# Altium PCB DBD_plasma.PcbDoc
Units mm, origin at the board's own origin, x right, y up, seen from the top; angles counter-clockwise.
Board outline 180 x 60 mm, 4 copper layers (Top Layer, GND, PWR_SIG, Bottom Layer), stack 1.63 mm thick; 123 components, 73 nets, 396 pads, 0 vias.
Unrouted connection lines stored in the file: 242.
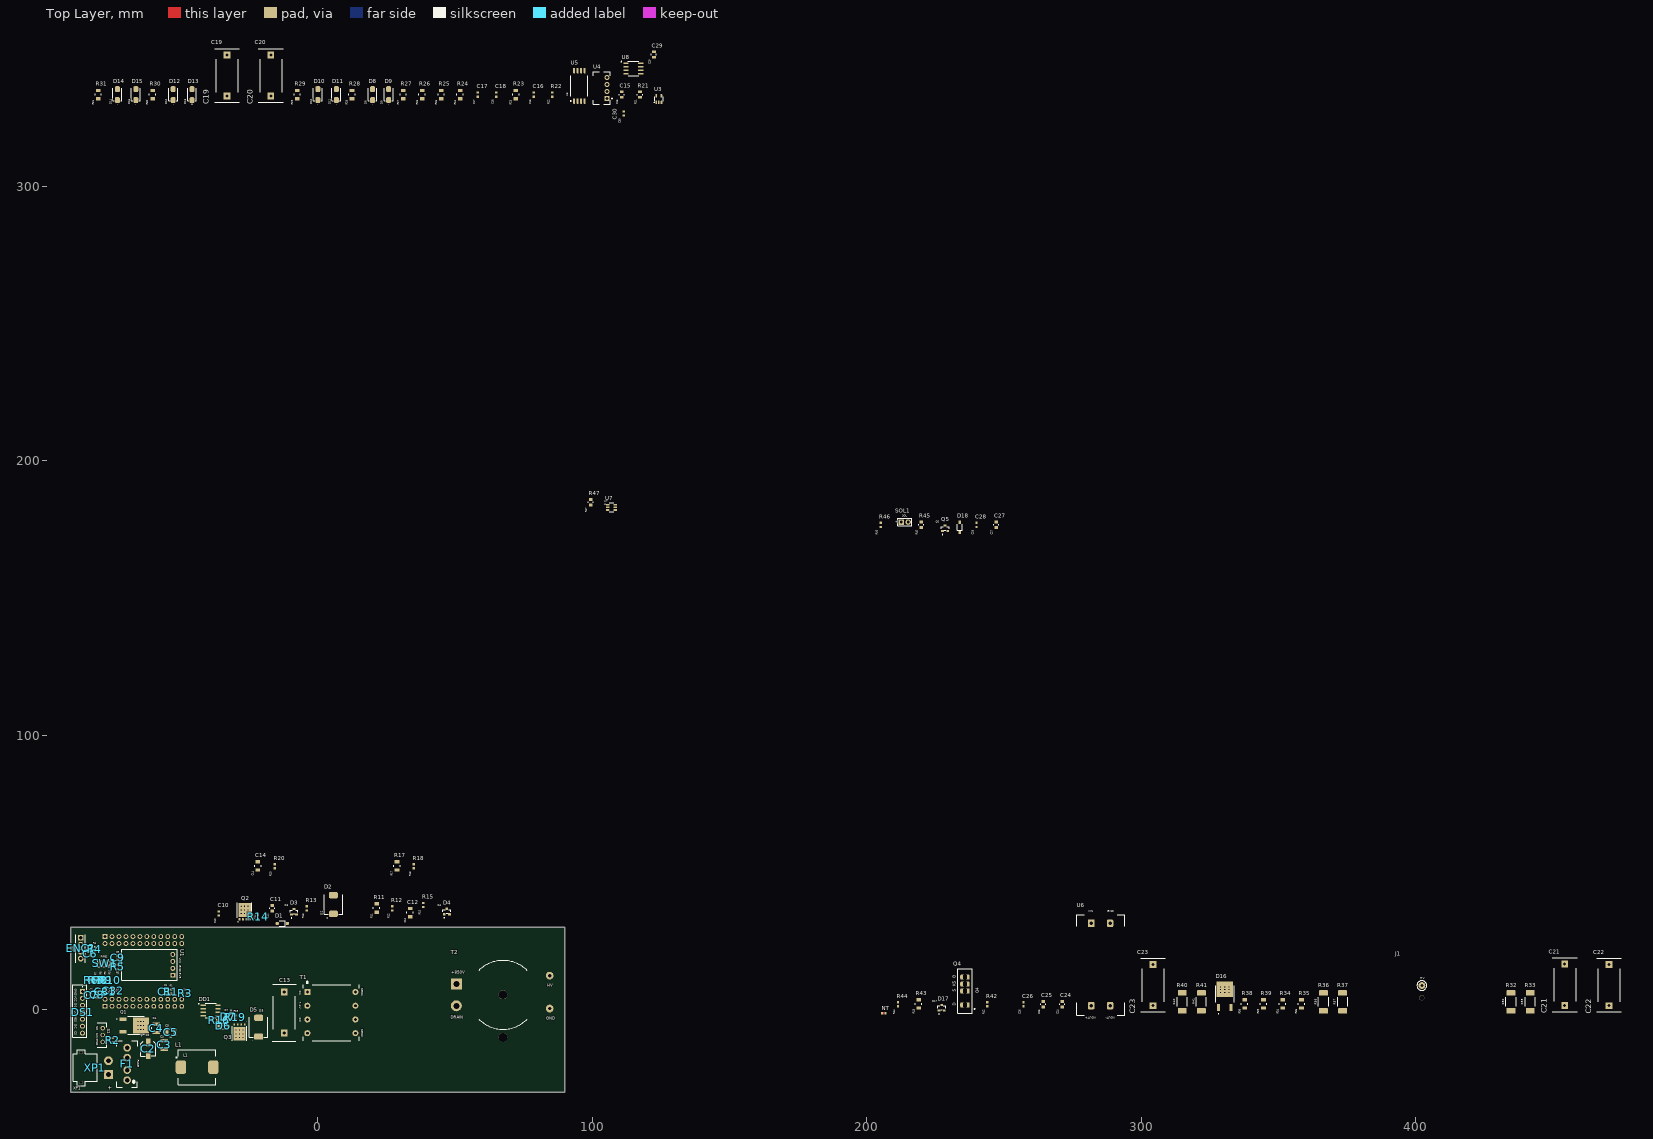
[diagram p0: Top Layer view]
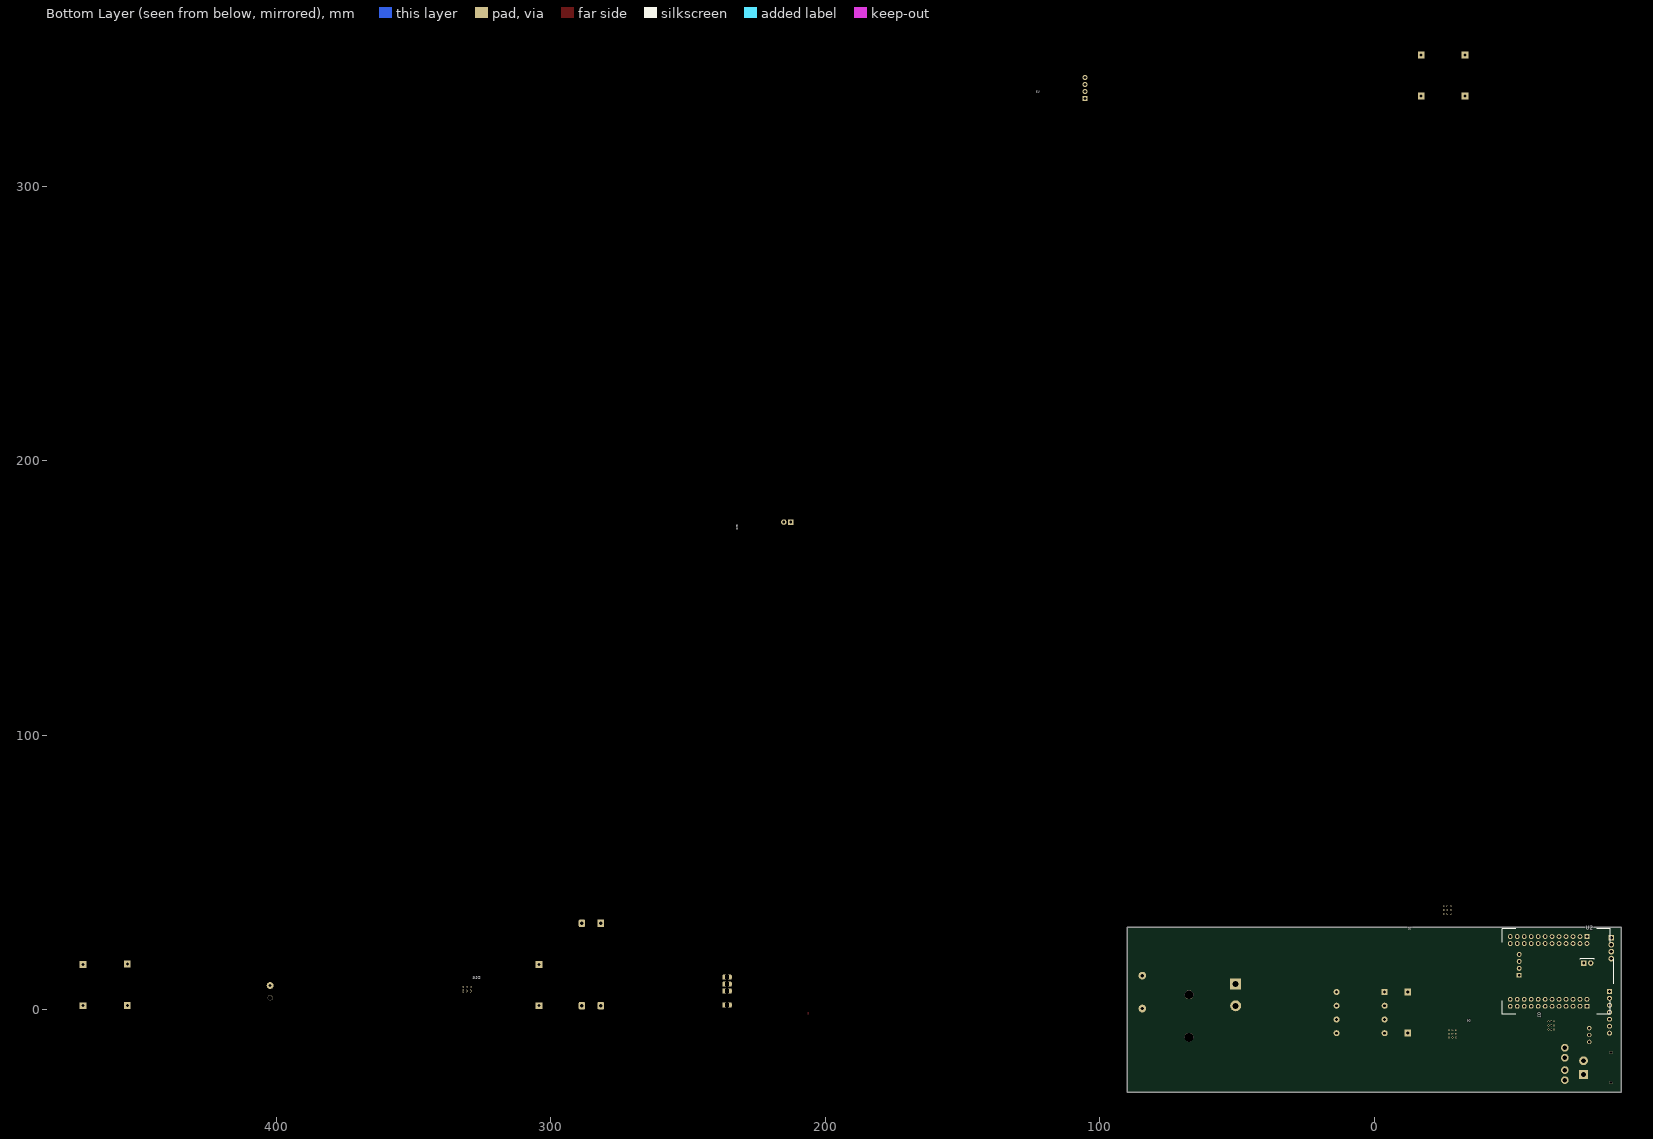
[diagram p1: Bottom Layer view, seen from below]

## Layer stack, top to bottom
Top Solder: solder mask 0.0102, Solder Resist, Dk 3.5
Top Layer: signal copper 0.0356
Dielectric 1: prepreg 0.2108, PP-006, Dk 4.1
GND: signal copper 0.035
Dielectric 2: dielectric 1.0668, FR-4, Dk 4.8
PWR_SIG: signal copper 0.035
Dielectric 3: prepreg 0.2108, PP-006, Dk 4.1
Bottom Layer: signal copper 0.0356
Bottom Solder: solder mask 0.0102, Solder Resist, Dk 3.5

## Board outline
-90,-30 90,-30 90,30 -90,30

## Design rules (kind name [scope] priority, off if disabled: settings)
Clearance Clearance_HV_Pulse_7kV [InNetClass('HV_PULSE')] p1: gap=8 ignorepadtopadclearanceinfootprint=TRUE
Clearance Clearance_HV_Divider [InComponent('R23') Or InComponent('R24') Or InComponent('R25') Or InComponent('R26') vs InComponent('R23') Or InComponent('R24') Or InComponent('R25') Or InComponent('R26')] p2: gap=0.8 ignorepadtopadclearanceinfootprint=FALSE
Clearance Clearance_SiC_Gate_Loop [InNetClass('SIC_GATE') vs InNetClass('PWR_BAT') or InNetClass('ZVS_RESONANT')] p3: gap=1.5 ignorepadtopadclearanceinfootprint=FALSE
Clearance Clearance_HV_DC_Internal [InNetClass('HV_DC_850V') vs InNetClass('HV_DC_850V')] p4: gap=2.5 ignorepadtopadclearanceinfootprint=FALSE
Clearance Clearance_HV_to_LV_Barrier [InNetClass('HV_DC_850V') vs NOT InNetClass('HV_DC_850V')] p5: gap=6 ignorepadtopadclearanceinfootprint=TRUE
Clearance [All] p6: gap=0.15 ignorepadtopadclearanceinfootprint=FALSE
MinimumSolderMaskSliver [All] p1: minsoldermaskwidth=0.1
PolygonConnect PolygonConnect_Thermal [IsThruPin] p1: connectstyle=Relief reliefconductorwidth=0.5 reliefentries=4 polygonreliefangle="90 Angle" airgapwidth=0.3
PolygonConnect PolygonConnect_Direct [InNetClass('PWR_BAT') or InNetClass('ZVS_RESONANT') or InNetClass('HV_DC_850V')] p2: connectstyle=Direct reliefconductorwidth=0.254 reliefentries=4 polygonreliefangle="90 Angle" airgapwidth=0.254
PolygonConnect [All] p3: connectstyle=Relief reliefconductorwidth=0.254 reliefentries=4 polygonreliefangle="90 Angle" airgapwidth=0.254
RoutingVias RoutingVias_Power [InNetClass('PWR_BAT') or InNet('GND') or InNet('HV_GND')] p1: holewidth=0.4 width=0.8 viastyle="Through Hole" minholewidth=0.3 minwidth=0.6 maxholewidth=0.5 maxwidth=1
RoutingVias [All] p2: holewidth=0.3 width=0.5 viastyle="Through Hole" minholewidth=0.3 minwidth=0.5 maxholewidth=0.5 maxwidth=0.8
ShortCircuit [InComponent('NT*')] p1: allowed=TRUE
SilkToSolderMaskClearance [IsPad] p1: minsilkscreentomaskgap=0.15 clearancetoexposedcopper=TRUE
SolderMaskExpansion [All] p1: expansion=0.05 istentingtop=FALSE
SupplyNets "Schematic Supply Nets_4" [InNet('+3V3')] p1: voltage=0.000
SupplyNets "Schematic Supply Nets_3" [InNet('VBAT_SW')] p2: voltage=0.000
SupplyNets "Schematic Supply Nets_2" [InNet('HV_GND')] p3: voltage=0.000
SupplyNets "Schematic Supply Nets_1" [InNet('GND')] p4: voltage=0.000
SupplyNets "Schematic Supply Nets" [InNet('HV_BUS')] p5: voltage=0.000
Width Width_3V3_Logic_PWR [InNet('+3V3') or InNet('+15V_SIC')] p1: maxlimit=1 minlimit=0.3 preferedwidth=0.5
Width Width_SiC_Gate [InNetClass('SIC_GATE')] p2: maxlimit=1 minlimit=0.4 preferedwidth=0.6
Width Width_ZVS_Resonant [InNetClass('ZVS_RESONANT')] p3: maxlimit=15 minlimit=3 preferedwidth=4.5
Width Width_PWR_Battery [InNetClass('PWR_BAT')] p4: maxlimit=5 minlimit=2 preferedwidth=3
Width [All] p5: maxlimit=1 minlimit=0.15 preferedwidth=0.2
27 further rules are at their usual default settings.

## Classes and differential pairs
component class 06_Pneumatics: C27 C28 D18 Q5 R45 R46 SOL1
component class 05_SiC_Nanosecond_Stage: C21 C22 C23 C24 C25 C26 D16 D17 J1 NT Q4 R32 R33 R34 R35 R36 R37 R38 R39 R40 R41 R42 R43 R44 R47 T2 U6 U7
component class 04_HV_Bus_Sense: C15 C16 C17 C18 C19 C20 C29 C30 D8 D9 D10 D11 D12 D13 D14 D15 R21 R22 R23 R24 R25 R26 R27 R28 R29 R30 R31 U3 U4 U5 U8
component class 03_ZVS_PushPull: C10 C11 C12 C13 C14 D1 D2 D3 D4 D5 D6 D7 DD1 L1 Q2 Q3 R11 R12 R13 R14 R15 R16 R17 R18 R19 R20 T1
component class 02_MCU_Control_UI: C6 C7 C8 C9 C31 C32 DS1 ENC? R4 R5 R6 R7 R8 R9 R10 SW1 U2
component class 01_Power_Input: C1 C2 C3 C4 C5 F1 Q1 R1 R2 R3 S1 U1 XP1

## Components (designator, comment, footprint, x,y, rotation, side; value= is the part's Value field where it differs from the comment)
C1 "100nF" CHIP_0603_SMD -55.5,6.625 r90 top
C2 "100uF 16V" CAP_ALU_SMD_D5.0_L5.4 -61.725,-14.125 r270 top
C3 "22uF 25V" CHIP_1210_3225 -55.875,-12.825 r90 top
C4 "22uF 25V" CHIP_1210_3225 -58.875,-6.75 r270 top
C5 "22uF 25V" CHIP_1210_3225 -53.55,-8.225 r180 top
C6 "100nF" CHIP_0603_SMD -82.9,20.45 r90 top
C7 "100nF" CHIP_0603_SMD -82.575,5.225 r90 top
C8 "10uF" CHIP_0805_SMD -80.325,5.45 r90 top
C9 "100nF" CHIP_0603_SMD -72.85,18.95 r270 top
C10 "100nF" CHIP_0603_SMD -36.075,35.075 r90 top
C11 "2.2uF 25V" CHIP_0805_SMD -16.523,36.946 r90 top
C12 "2.2nF 100V" CHIP_1206_SMD 33.65,35.375 r90 top
C13 "220nF 100V" CAP_FILM_P15.0_CBB22_W8.5_MKP -12.2,-1 r90 top
C14 "2.2nF 100V" CHIP_1206_SMD -21.794,52.398 r90 top
C15 "4.7uF 16V" CHIP_0805_SMD 110.787,333.347 r90 top
C16 "1nF 50V NP0" CHIP_0603_SMD 78.656,333.347 r90 top
C17 "100nF" CHIP_0603_SMD 58.336,333.347 r90 top
C18 "100nF" CHIP_0603_SMD 65.067,333.347 r90 top
C19 "1nF 2000V" CAP_FILM_P15.0_CBB81_HEAVY_DUTY -33.104,340.332 r90 top
C20 "1nF 2000V" CAP_FILM_P15.0_CBB81_HEAVY_DUTY -17.102,340.332 r90 top
C21 "470pF 2kV" CAP_FILM_P15.0_CBB81_HEAVY_DUTY 454.195,9.116 r90 top
C22 "330pF 2kV" CAP_FILM_P15.0_CBB81_HEAVY_DUTY 470.324,8.989 r90 top
C23 "3.3nF 2000V" CAP_FILM_P15.0_CBB81_HEAVY_DUTY 304.208,8.989 r90 top
C24 "2.2uF 25V" CHIP_0805_SMD 271.188,2.004 r90 top
C25 "10uF" CHIP_0805_SMD 264.33,2.004 r90 top
C26 "100nF" CHIP_0603_SMD 257.091,2.004 r90 top
C27 "10uF" CHIP_0805_SMD 247.185,176.629 r90 top
C28 "100nF" CHIP_0603_SMD 239.946,176.629 r90 top
C29 "2.2uF 25V" CHIP_0805_SMD 122.471,347.952 r90 top
C30 "100nF" CHIP_0603_SMD 111.422,326.489 r90 top
C31 "100nF" CHIP_0603_SMD -77.425,6.625 r270 top
C32 "10uF" CHIP_0805_SMD -74.45,6.85 r270 top
D1 "1N5819HW" SOD-123_2P_SMD -12.9,31.45 r180 top
D2 "39V 1.5kW" DIODE_DO-214AB_SMC 5.702,38.343 r90 top
D3 "BZX84-C15" SOT-23_3P_SMD -8.649,35.676 r0 top
D4 "BAT54C" SOT-23_3P_SMD 47.025,35.775 r0 top
D5 "39V 1.5kW" DIODE_DO-214AB_SMC -21.525,-6.35 r90 top
D6 "1N5819HW" SOD-123_2P_SMD -34.475,-5.9 r0 top
D7 "BZX84-C15" SOT-23_3P_SMD -32.55,-2.55 r180 top
D8 "US2M" DIODE_DO-214AC_SMA 19.982,333.347 r90 top
D9 "US2M" DIODE_DO-214AC_SMA 25.824,333.347 r90 top
D10 "US2M" DIODE_DO-214AC_SMA 0.043,333.347 r90 top
D11 "US2M" DIODE_DO-214AC_SMA 6.774,333.347 r90 top
D12 "US2M" DIODE_DO-214AC_SMA -52.662,333.347 r90 top
D13 "US2M" DIODE_DO-214AC_SMA -45.804,333.347 r90 top
D14 "US2M" DIODE_DO-214AC_SMA -72.982,333.347 r90 top
D15 "US2M" DIODE_DO-214AC_SMA -66.251,333.347 r90 top
D16 "C4D02120E" TO-252-2L_DPAK_THERMAL 330.37,4.925 r0 top
D17 "BAT54S" SOT-23_3P_SMD 227.246,0.734 r0 top
D18 "1N5819HW" SOD-123_2P_SMD 233.85,175.74 r90 top
DD1 "UCC27524DR" SOIC-8_1.27_4.9x3.9mm -39,-0.3 r0 top
DS1 "OLED_0.96_SPI_7PIN" DISP_OLED_0.96_SSD1306_SPI_7PIN_THT -85.675,-0.905 r270 top
ENC? "EC11" ENC_EC11_VERTICAL_THT -86.35,21.175 r270 top
F1 "20A 32V" FUSE_HOLDER_MINI_KEYSTONE_3544 -69.425,-19.725 r90 top
J1 "HV_V/G" PAD_HV_UL3239_28AWG_ROUND 402.175,8.825 r0 top
L1 "22uH 12A" IND_SRP1265A_13.5x12.5_HANDSOLDER -43.95,-20.9 r0 top
NT "net_tie" NET_TIE_SMD 206.164,-1.298 r0 top net-tie
Q1 "AOD4185" TO-252-2L_DPAK_THERMAL -66.875,-5.7 r270 top
Q2 "CSD18534Q5A" SON-8_5x6_CSD18534Q5A_THERMAL -26.625,35.7 r270 top
Q3 "CSD18534Q5A" SON-8_5x6_CSD18534Q5A_THERMAL -28.475,-8.1 r90 top
Q4 "C3M0075120K" TO-247-4_WOLFSPEED_SLOTTED_VERT 235.755,6.83 r90 top
Q5 "AO3400A" SOT-23_3P_SMD 228.516,175.359 r0 top
R1 "47.5k" CHIP_0603_SMD -53.4,6.625 r90 top
R2 "100k" CHIP_0603_SMD -74.65,-11.05 r270 top
R3 "100k" CHIP_0603_SMD -48.3,6 r180 top
R4 "10k" CHIP_0603_SMD -81.15,22.075 r90 top
R5 "10k" CHIP_0603_SMD -72.875,15.625 r270 top
R6 "33R" CHIP_0603_SMD -82.5,10.675 r90 top
R7 "33R" CHIP_0603_SMD -80.775,10.725 r90 top
R8 "33R" CHIP_0603_SMD -79.025,10.8 r90 top
R9 "33R" CHIP_0603_SMD -77.325,10.825 r90 top
R10 "33R" CHIP_0603_SMD -75.65,10.825 r90 top
R11 "5.62" CHIP_1206_SMD 21.45,37.073 r90 top
R12 "10k" CHIP_0603_SMD 27.165,36.946 r90 top
R13 "10k" CHIP_0603_SMD -3.95,36.946 r90 top
R14 "4.7" CHIP_0603_SMD -21.75,33.85 r90 top
R15 "1k" CHIP_0603_SMD 38.425,38.15 r90 top
R16 "4.7" CHIP_0603_SMD -35.85,-3.85 r0 top
R17 "5.62" CHIP_1206_SMD 28.879,52.398 r90 top
R18 "10k" CHIP_0603_SMD 34.975,52.271 r90 top
R19 "10k" CHIP_0603_SMD -30.025,-2.8 r270 top
R20 "1k" CHIP_0603_SMD -15.698,52.271 r90 top
R21 "300" CHIP_0805_SMD 117.391,333.347 r90 top
R22 "3.9k" CHIP_0603_SMD 85.387,333.347 r90 top
R23 "510k" CHIP_1206_SMD 72.179,333.347 r90 top
R24 "510k" CHIP_1206_SMD 51.859,333.347 r90 top
R25 "510k" CHIP_1206_SMD 45.001,333.347 r90 top
R26 "510k" CHIP_1206_SMD 38.016,333.347 r90 top
R27 "3.9M" CHIP_1206_SMD 31.158,333.347 r90 top
R28 "3.9M" CHIP_1206_SMD 12.489,333.347 r90 top
R29 "3.9M" CHIP_1206_SMD -7.45,333.347 r90 top
R30 "3.9M" CHIP_1206_SMD -60.155,333.347 r90 top
R31 "3.9M" CHIP_1206_SMD -79.967,333.347 r90 top
R32 "12R" RES_2512_6.3x3.2_HANDSOLDER 434.637,2.893 r90 top
R33 "12R" RES_2512_6.3x3.2_HANDSOLDER 441.622,2.893 r90 top
R34 "4.7k" CHIP_1206_SMD 351.452,2.131 r90 top
R35 "4.7k" CHIP_1206_SMD 358.31,2.131 r90 top
R36 "12R" RES_2512_6.3x3.2_HANDSOLDER 366.311,2.893 r90 top
R37 "12R" RES_2512_6.3x3.2_HANDSOLDER 373.296,2.893 r90 top
R38 "4.7k" CHIP_1206_SMD 337.609,2.131 r90 top
R39 "4.7k" CHIP_1206_SMD 344.467,2.131 r90 top
R40 "12R" RES_2512_6.3x3.2_HANDSOLDER 314.876,2.893 r90 top
R41 "12R" RES_2512_6.3x3.2_HANDSOLDER 321.861,2.893 r90 top
R42 "4.7" CHIP_0603_SMD 243.883,2.004 r90 top
R43 "0R" CHIP_1206_SMD 218.864,2.131 r90 top
R44 "10k" CHIP_0603_SMD 211.371,2.004 r90 top
R45 "110R" CHIP_0805_SMD 219.88,176.629 r90 top
R46 "10k" CHIP_0603_SMD 205.021,176.629 r90 top
R47 "110R" CHIP_0805_SMD 99.484,184.884 r90 top
S1 "SW_PWR" TNT_SW_SLIDE_2.5mm -78.325,-9.2 r270 top
SOL1 "0520D (6V)" PAD_2P_THT_P2.54MM 213.784,177.645 r0 top
SW1 "KEY_FIRE" PAD_WIRE_2P_STRAIN_P2.54 -77.575,17.025 r180 top
T1 "EFD20" TRANS_EFD20_CORETECH_BH-EFD20-1-8R_THT 4.975,-1.025 r0 top
T2 "T2 (Epcos N87)" TRANS_AUTOTRANS_T2_EPCOS_R20_N87 67.475,5.45 r0 top
U1 "MP2315 (3.3V)" MODULE_DC-DC_MP2315_MINI_BUCK_THT -52.8,16.38 r180 top
U2 "WeAct_STM32G474CEU6" MODULE_WEACT_STM32G474CEU6_DIP -66.31,13.96 r0 bottom
U3 "ME6211C50M5G" SOT-23-5_M5_HANDSOLDER 124.249,331.696 r0 top
U4 "B0505S-1WR3" CONV_DC-DC_MORNSUN_SIP-4_11.6x6.0 103.421,335.76 r90 top
U5 "AMC1311" SOIC-8-DWV_WIDE_HANDSOLDER 95.293,336.522 r90 top
U6 "Step-Up 15V" MODULE_DC-DC_MT3608_BOOST_THT 285.179,16.496 r90 top
U7 "UCC27511" SOT-23-6_DBV_HANDSOLDER 106.977,182.979 r0 top
U8 "LM78L05" SOIC-8_1.27_4.9x3.9mm 114.971,342.814 r0 top
XP1 "7.4V_IN" CONN_XT30PW-M_2P -86.225,-21.05 r90 top

## Footprints (in the part's own frame and the unit in brackets; to place one, negate y for a bottom-side part, rotate by r counter-clockwise, add the part's x,y. Pads: shape width x height; smd on the part's side, far side on the other; paste and mask are expansions set on the pad)
CAP_ALU_SMD_D5.0_L5.4 [mm] "SMD Aluminum Electrolytic Capacitor, Dia 5.0mm, Length 5.4mm, Base 5.3x5.3mm, 100uF 16V, Pitch 4.4mm (Hand Solder)"
  rect 3x1.6 smd mask+0.05: 1(-2.2,0) 2(2.3,-0.025)
  silkscreen extent -2.7,-2.7 2.73,2.7, body extent -3,-2.65 3,2.65, height 5.8
CAP_FILM_P15.0_CBB22_W8.5_MKP [mm] "Film Capacitor Metallized  (MKP/CBB22), Pitch 15mm, Body 18.0x8.5x14.0mm, ZVS Resonant Tank"
  rect 2.5x2.5 hole 1.1 mask+0.05: 1(-7.5,0) 2(7.5,0)
  silkscreen extent -10.4,-4.32 10.28,4.35, body extent -9.33,-3.9 9.17,4.1, height 18
CAP_FILM_P15.0_CBB81_HEAVY_DUTY [mm] "Radial Film Capacitor (Dipped Epoxy/Pillow Type). Pitch: 15.0mm. Optimized for CBB81"
  rect 2.5x2.5 hole 1.1 mask+0.05: 1(-7.5,0) 2(7.5,0)
  silkscreen extent -9.75,-4.5 9.75,4.5, body extent -9.25,-4.53 9.25,4.48, height 19
CHIP_0603_SMD [mm] "Chip Component 0603 (1608 Metric), Hand Soldering Extended Pads (0.8x0.85mm, Pitch 1.5mm), IPC-7351"
  rect 0.8x0.85 smd mask+0.05: 1(-0.75,0) 2(0.75,0)
  body extent -0.83,-0.48 0.77,0.47, height 0.8
CHIP_0805_SMD [mm] "Chip Component 0805 (2012 Metric), IPC-7351 Level B (Nominal), Pad 1.0x1.3mm, Pitch 2.0mm"
  rect 1x1.3 smd mask+0.05: 1(-1,0) 2(1,0)
  silkscreen extent -0.2,-0.9 0.2,0.95, body extent -1,-0.63 1,0.63, height 1.22
CHIP_1206_SMD [mm] "Chip Component 1206 (3216 Metric), IPC-7351 Level B (Nominal), Pad 1.2x1.7mm, Pitch 3.0mm"
  rect 1.2x1.7 smd mask+0.05: 1(-1.5,0) 2(1.5,0)
  silkscreen extent -0.3,-1.15 0.3,1.15, body extent -1.6,-0.8 1.6,0.8, height 0.8
CHIP_1210_3225 [mm] "Chip Component 1210 (3225 Metric), IPC-7351 Level B (Nominal), Pad 1.2x2.7mm, Pitch 3.0mm"
  rect 1.2x2.7 smd mask+0.05: 1(-1.5,0) 2(1.5,0)
  silkscreen extent -0.4,-1.65 0.4,1.65, body extent -1.6,-1.25 1.6,1.25, height 1.22
CONN_XT30PW-M_2P [mm] "DC Power Connector, Male 90° (Right Angle) PCB Mount, 2-Pin, Pitch 5.0mm, 30A Cont. / 50A Peak, with Locating Pins, Amass XT30PW-M"
  rect 3.2x3.2 hole 1.75 mask+0.05: 1(-2.5,-10)
  round 3.2 hole 1.75 mask+0.05: 2(2.5,-10)
  round 1.1 hole 1.1 unplated mask+0.05: ""(-5.5,0) ""(5.5,0)
  silkscreen extent -6.58,-6 6.58,2.88, body extent -6.65,-11 6.65,2.95, height 5
CONV_DC-DC_MORNSUN_SIP-4_11.6x6.0 [mm] "Isolated DC-DC Converter 1W, SIP-4 Package, Mornsun B_S-1WR3 / E_S-1WR3 Series, Body 11.60x6.00x10.16mm, Pitch 2.54mm, 3kV Isolation"
  rect 1.8x1.8 hole 1 mask+0.05: 1(-3.81,-1.95)
  round 1.8 hole 1 mask+0.05: 2(-1.27,-1.95) 3(1.27,-1.95) 4(3.81,-1.95)
  silkscreen extent -5.9,-3.8 5.9,3.1, body extent -5.8,-3 5.8,2.99, height 10.66
DIODE_DO-214AB_SMC [mm] "DO-214AB (SMC) Surface Mount Diode, 2-Lead, Body 7.0x6.0mm, Total Span 8.0mm, IPC-7351 Nominal"
  rrect50% 2.3x3.3 smd mask+0.05: 1(-3.4,0) 2(3.4,0)
  silkscreen extent -4.92,-3.35 3.6,3.35, body extent -3.95,-3.1 3.95,2.7, height 2.23
DIODE_DO-214AC_SMA [mm] "DO-214AC (SMA) Surface Mount Diode, 2-Lead, Body 4.6x2.8mm, Total Span 5.6mm, IPC-7351 Nominal"
  rrect50% 2.1x1.8 smd mask+0.05: 1(-2,0) 2(2,0)
  silkscreen extent -3.52,-1.6 2.3,1.6, body extent -2.5,-1.35 2.55,1.35, height 2.17
DISP_OLED_0.96_SSD1306_SPI_7PIN_THT [mm] "0.96 inch OLED Display Module, SSD1306, 128x64, 7-Pin 2.54mm SPI Header, 4x M2 Mounting Holes (23.3x23.8mm Pitch), Body 27.30x27.80mm"
  rect 1.8x1.8 hole 1.05 mask+0.05: 1(-7.62,0)
  round 1.8 hole 1.05 mask+0.05: 2(-5.08,0) 3(-2.54,0) 4(0,0) 5(2.54,0) 6(5.08,0) 7(7.62,0)
  silkscreen extent -10.1,-3.5 9.03,1.55
ENC_EC11_VERTICAL_THT [mm] "Rotary Encoder EC11 with Push Switch, Vertical THT, Body 11.8x14.5mm, Bushing M7x0.75, 2x Side Mounting Brackets"
  rect 2.1x2.1 hole 1.15 mask+0.05: A(-5.08,0)
  round 2.1 hole 1.15 mask+0.05: B(-2.54,0) C(2.54,0) D(0,0)
  silkscreen extent -6.15,-1.75 4,1.75
FUSE_HOLDER_MINI_KEYSTONE_3544 [mm] "Mini Automotive Blade Fuse Clip Assembly, Keystone 3544, 4-Pin In-Line THT, Hole D=1.7mm, Body 14.68x4.75mm, Dual-Pin per Terminal for 20-30A"
  round 2.8 hole 1.7 mask+0.05: 1(-5.9,0) 1(-2.24,0) 2(2.24,0) 2(5.9,0)
  silkscreen extent -8.5,-3.77 8.5,3.77, body extent -9.15,-1.78 9.85,3.22, height 20.2
IND_SRP1265A_13.5x12.5_HANDSOLDER [mm] "Shielded Power Inductor, Body 13.5x12.5x6.2mm, Bourns SRP1265A Series, Extended Pads (3.8x5.0mm, 8.0mm Gap) for Manual Soldering"
  rrect50% 3.8x5 smd mask+0.05: 1(-5.9,0) 2(5.9,0)
  silkscreen extent -7.58,-6.4 6.8,6.4, body extent -6.75,-6.25 6.75,6.25, height 6.5
MODULE_DC-DC_MP2315_MINI_BUCK_THT [mm] "Mini MP2315 Step-Down Buck Converter Module, 4-Pin 2.54mm Pitch Header (VO+, GND, IN+, EN), Board Size 20x11mm, Sub-Board PCB Mount"
  rect 1.8x1.8 hole 1.05 unplated mask+0.05: 1(0,3.81)
  round 1.8 hole 1.05 unplated mask+0.05: 2(0,1.27) 3(0,-1.27) 4(0,-3.81)
  silkscreen extent -1.6,-5.6 18.6,5.6, body extent -1.55,-5.48 18.45,5.53, height 7.59
MODULE_DC-DC_MT3608_BOOST_THT [mm] "MT3608 Step-Up Boost Converter Module, 36x17x7mm, 4-Pin Corner Mount (VIN+, VIN-, VOUT+, VOUT-), Pitch 31.0x13.5mm, Preset to 15V"
  rect 2.8x2.4 hole 1.3 mask+0.05: 1(15,3.45)
  rrect50% 2.8x2.4 hole 1.3 mask+0.05: 2(15,-3.45) 3(-15,3.45) 4(-15,-3.45)
  silkscreen extent -18.5,-8.7 18.2,8.7
MODULE_WEACT_STM32G474CEU6_DIP [mm] "WeAct Studio STM32G474CEU6 Core Board, 36.28x28.14mm, 4x12 Pin Headers Pitch 2.54mm (Row Dist 20.32/25.4mm) + 4-Pin SWD, Mapped to Custom Schematic Pins"
  rect 1.75x1.75 hole 1 mask+0.05: 1(-11.17,-12.7) 25(-11.17,12.7)
  round 1.75 hole 1 mask+0.05: 2(-11.17,-10.16) 2(-3.55,-10.16) 3(-8.63,-12.7) 4(-8.63,-10.16) 5(-6.09,-12.7) 6(-6.09,-10.16) 7(-3.55,-12.7) 9(-1.01,-12.7) 10(-1.01,-10.16) 11(1.53,-12.7) 12(1.53,-10.16) 13(4.07,-12.7) 14(4.07,-10.16) 15(6.61,-12.7) 16(6.61,-10.16) 17(9.15,-12.7) 18(9.15,-10.16) 19(11.69,-12.7) 20(11.69,-10.16) 21(14.23,-12.7) 22(14.23,-10.16) 23(16.77,-12.7) 24(16.77,-10.16) 26(-11.17,10.16) 27(-8.63,12.7) 28(-8.63,10.16) 29(-6.09,12.7) 30(-6.09,10.16) 31(-3.55,12.7) 32(-3.55,10.16) 33(-1.01,12.7) 34(-1.01,10.16) 35(1.53,12.7) 36(1.53,10.16) 37(4.07,12.7) 38(4.07,10.16) 39(6.61,12.7) 40(6.61,10.16) 41(9.15,12.7) 42(9.15,10.16) 43(11.69,12.7) 44(11.69,10.16) 45(14.23,12.7) 46(14.23,10.16) 47(16.77,12.7) 48(16.77,10.16)
  silkscreen extent -20.9,-15.55 19.65,15.55, body extent -18.34,-14.35 18.19,14.05, height 7.25
NET_TIE_SMD [mm]
  rrect20% 0.8x0.8 smd mask+0: 1(-0.6,0) 2(0.6,0)
  Top Layer region: -0.225,0.325 0.225,0.325 0.225,-0.325 -0.225,-0.325
PAD_2P_THT_P2.54MM [mm]
  rect 2x2 hole 1 mask+0.05: 1(-1.27,0)
  round 2 hole 1 mask+0.05: 2(1.27,0)
  silkscreen extent -2.6,-1.35 2.6,1.35, body extent -2.68,-1.43 2.68,1.43, height 3
PAD_HV_UL3239_28AWG_ROUND [mm] "High Voltage Wire Terminal, UL3239 28AWG (7x0.12), Hole D=1.0mm, Pad D=2.5mm Round, Integrated Strain Relief Hole D=1.8mm, 6-7kV DBD Jet"
  round 2.5 hole 1 mask+0.05: 1(0,0)
  round 1.8 hole 1.8 unplated mask+0: ""(0,-4.5)
  silkscreen extent -1.8,-1.8 1.8,1.8
PAD_WIRE_2P_STRAIN_P2.54 [mm]
  rect 2x2 hole 1 mask+0.05: 1(-1.27,0)
  round 2 hole 1 mask+0.05: 2(1.27,0)
  silkscreen extent -2.6,-1.35 2.6,1.35, body extent -2.68,-1.43 2.68,1.43, height 3
RES_2512_6.3x3.2_HANDSOLDER [mm] "Resistor SMD 2512 (Metric 6432), 1W, Extended Pads (2.00x3.20mm, 4.5mm Gap, 8.5mm Span) for Manual Soldering, Pulse Snubber"
  rrect20% 2x3.2 smd mask+0.05: 1(-3.25,0) 2(3.25,0)
  silkscreen extent -1.6,-1.85 1.6,1.85, body extent -3.17,-1.58 3.17,1.58, height 0.7
SOD-123_2P_SMD [mm] "SOD-123 Surface Mount Diode, 2-Lead, Body 2.7x1.6mm, Total Length 3.7mm, IPC-7351"
  rrect50% 1.2x1 smd mask+0.05: 1(-1.85,0) 2(1.85,0)
  silkscreen extent -1.02,-0.95 1.1,0.95, body extent -1.83,-0.77 1.83,0.77, height 1.55
SOIC-8-DWV_WIDE_HANDSOLDER [mm] "SOIC-8 Wide Body (TI DWV0008A), 8-Lead, Pitch 1.27mm, Body 7.5x5.85mm, 9.1mm Creepage/Clearance, Extended Pads (2.0x0.65mm) for Manual Soldering, AMC1311"
  rrect50% 2x0.65 smd mask+0.05: 1(-5.55,1.905) 2(-5.55,0.635) 3(-5.55,-0.636) 4(-5.55,-1.905) 5(5.55,-1.905) 6(5.55,-0.635) 7(5.55,0.635) 8(5.55,1.905)
  silkscreen extent -5.65,-3.1 3.75,3.25, body extent -5.75,-2.93 5.75,2.93, height 2.8
SOIC-8_1.27_4.9x3.9mm [mm] "SOIC-8 Surface Mount IC, 8-Lead, Pitch 1.27mm, Body 4.90x3.90mm, Span 6.00mm (TI D-Package)"
  rrect25% 1.9x0.6 smd paste+0 mask+0.05: 1(-2.7,1.905) 2(-2.7,0.635) 3(-2.7,-0.635) 4(-2.7,-1.905) 5(2.7,-1.905) 6(2.7,-0.635) 7(2.7,0.635) 8(2.7,1.905)
  silkscreen extent -4.45,-2.6 1.95,2.6, body extent -3,-2.45 3,2.45, height 1.75
SON-8_5x6_CSD18534Q5A_THERMAL [mm] "N-Channel Power MOSFET, SON 5x6mm (TI Q5A Package), Monolithic Drain Thermal Pad (4.95x4.50mm) with 2x2 Stencil Array & Thermal Vias, CSD18534Q5A"
  rrect50% 0.8x0.65 smd mask+0.05: 1(2.75,-0.635) 1(2.75,0.635) 2(2.75,1.905)
  rect 0.8x0.65 smd mask+0.05: 1(2.75,-1.905)
  round 0.6 hole 0.3 mask+0.05: 3(-2,1.25) 3(-2,0) 3(-2,-1.25) 3(-0.65,1.25) 3(-0.65,0) 3(-0.65,-1.25) 3(0.7,1.25) 3(0.7,0) 3(0.7,-1.25)
  rect 4.95x4.5 smd paste-5 mask+0.05: 3(-0.65,0)
  silkscreen extent -3.2,-2.65 3.72,2.65, body extent -3,-2.45 3,2.45, height 1.1
SOT-23-5_M5_HANDSOLDER [mm] "SOT-23-5 (TO-236-5), 5-Lead, Pitch 0.95mm, Extended Pads (1.25x0.60mm) for Manual Soldering, Body 2.90x1.60mm, ME6211"
  rrect50% 0.6x1.25 smd mask+0.04: 1(-0.95,-1.2) 2(0,-1.2) 3(0.95,-1.2) 4(0.95,1.2) 5(-0.95,1.2)
  silkscreen extent -1.76,-1.29 1.55,0.8, body extent -1.45,-1.35 1.45,1.35, height 1.45
SOT-23-6_DBV_HANDSOLDER [mm] "SOT-23-6 (TI DBV0006A), 6-Lead, Pitch 0.95mm, Extended Pads (1.25x0.60mm) for Manual Soldering, UCC27511"
  rrect50% 1.25x0.6 smd mask+0.04: 1(-1.4,0.95) 2(-1.4,0) 3(-1.4,-0.95) 4(1.4,-0.95) 6(1.4,0.95)
  rrect50% 1.25x0.6 smd mask+0.05: 5(1.4,0)
  silkscreen extent -2.39,-1.65 0.8,1.65, body extent -1.4,-1.45 1.4,1.45, height 1.45
SOT-23_3P_SMD [mm] "SOT-23 (TO-236AB) 3-Lead, Pitch 0.95mm, Body 2.9x1.3mm, IPC-7351 Nominal"
  rrect25% 1x0.8 smd paste+0 mask+0.05: 1(-0.95,-1) 2(0.95,-1) 3(0,1)
  silkscreen extent -1.45,-2.35 1.45,0.65, body extent -1.52,-1.3 1.52,1.3, height 1.3
TNT_SW_SLIDE_2.5mm [mm] "Slide Switch SPDT (1P2T), Vertical, Body 8.5x3.7x3.5mm, Metric Pitch 2.50mm, Travel 2.0mm, Extended Oval Pads (1.70x2.40mm) for Manual Soldering, SS12D00"
  round 1.6 hole 1 mask+0.05: 1(-2.5,0) 2(0,0) 3(2.5,0)
  silkscreen extent -4.45,-1.95 4.45,1.55
TO-247-4_WOLFSPEED_SLOTTED_VERT [mm] "TO-247 4-Lead Package, Pitch 5.08-2.54-2.54mm, Plated Slots (1.33x2.01mm), Dedicated Kelvin Source, Wolfspeed C3M0075120K / C3M Series"
  rrect50% 1.84x3.46 hole 1.33 slot 2.01 at 0 deg mask+0.05: 1(-5.08,0) 2(0,0) 3(2.54,0) 4(5.08,0)
  silkscreen extent -8.15,-3.56 8.15,2.7, body extent -7.97,-2.51 7.97,2.51, height 22.61
TO-252-2L_DPAK_THERMAL [mm] "TO-252-2L (DPAK), 2.28mm Pitch, Tab Drain with 3x3 Thermal Vias Array (0.6/0.3mm), Alpha & Omega AOD4185"
  rect 1.2x2.6 smd mask+0.05: 1(-2.29,-4.05) 3(2.29,-4.05)
  round 0.6 hole 0.3 unplated mask+0.05: 2(-1.5,1.4) 2(-1.5,2.4) 2(-1.5,3.4) 2(0,1.4) 2(0,2.4) 2(0,3.4) 2(1.5,1.4) 2(1.5,2.4) 2(1.5,3.4)
  rect 5.9x5.7 smd mask+0.05: 2(0,2.5)
  silkscreen extent -3.34,-6.42 3.21,3.74, body extent -3.3,-5.02 3.3,5.02, height 2.4
TRANS_AUTOTRANS_T2_EPCOS_R20_N87 [mm] "Pulse Transformer T2, Epcos B64290L0632X087 (R20x10x7 N87 Toroid), Pri Braid 3mm (Pad D4.0/H2.2), Sec UL3239 28AWG, 2x Zip-Tie NPTH D3.2mm"
  rect 4x4 hole 2.2 mask+0.05: 1(-17,4)
  round 4 hole 2.2 mask+0.05: 2(-17,-4)
  round 2.8 hole 1.2 mask+0.05: 3(17,-5) 4(17,7)
  round 3.2 hole 3.2 unplated mask+0.05: ""(0,-15.5) ""(0,0)
  silkscreen extent -8.85,-12.52 8.84,12.5, body extent -10,-10 10,10, height 5.5
TRANS_EFD20_CORETECH_BH-EFD20-1-8R_THT [mm] "Transformer Bobbin EFD20/10/7, CoreTech BH-EFD20-1-8R (PHL), 8-Pin THT, Row Pitch 17.5mm, Pin Pitch 5.0mm, Dedicated 15mm HV Secondary Spacing (Pins 8-5)"
  rect 2.2x2.2 hole 1 mask+0.05: 1(-8.75,7.5)
  round 2.2 hole 1 mask+0.05: 2(-8.75,2.5) 3(-8.75,-2.5) 5(8.75,7.5) 8(8.75,-7.5) ""(-8.75,-7.5) ""(8.75,-2.5) ""(8.75,2.5)
  silkscreen extent -10.2,-10.2 10.2,11.4, body extent -10.09,-10.02 9.92,9.98, height 9.9

## Part data
C1 C6 C7 C9 C10 C17 C18 C26 C28 C30 C31: library part CAP_0603_100nF_50V_X7R, "Capacitor MLCC, Ceramic, 100 nF, 50 V, ±10%, X7R, SMD 0603, Samsung Electro-Mechanics", Part Number=CL10B104KB8NNNC
C2: library part CAP_POLY_SMD_100uF_16V_D6.3, "Capacitor Polymer Aluminum, 100 uF, 16 V, ±20%, Low ESR, SMD Can 6.3x5.8 mm, Panasonic OS-CON / Nichicon"
C3 C4 C5: library part CAP_1210_22uF_25V_X7R, "Capacitor MLCC, Ceramic, 22 uF, 25 V, ±10%, X7R, SMD 1210, Murata Electronics"
C8 C25 C27 C32: library part CAP_0805_10uF_16V_X7R, "Capacitor MLCC, Ceramic, 10 uF, 16 V, ±10%, X7R, SMD 0805, Hitano Enterprise", Part Number=0805B106K160NT
C11 C24 C29: library part CAP_0805_2.2uF_25V_X7R, "Capacitor MLCC, Ceramic, 2.2 uF, 25 V, ±10%, X7R, SMD 0805, Hitano Enterprise"
C12 C14: library part CAP_1206_2.2nF_100V_C0G, "Capacitor MLCC, Ceramic, 2.2 nF, 100 V, ±5%, C0G/NP0, SMD 1206, High Frequency Snubber, Yageo"
C13: library part CAP_FILM_CBB22_220nF_630V_P15, "Capacitor Film, Metallized Polypropylene (MKP/CBB22), 0.22 uF (220 nF), 630 VDC, ±5%, Radial THT, Pitch 15.0mm, ZVS Primary Tank"
C15: library part CAP_0805_4.7uF_16V_X7R, "Capacitor MLCC, Ceramic, 4.7 uF, 16 V, ±10%, X7R, SMD 0805, Bypass / Decoupling, Samsung / Murata"
C16: library part CAP_0603_1nF_50V_NP0, "Capacitor MLCC, Ceramic, 1 nF, 50 V, ±5%, C0G/NP0, SMD 0603, High Frequency Filter, Samsung Electro-Mechanics"
C19 C20: library part CAP_FILM_CBB81_1nF_2000V, "Capacitor Film, Metallized Polypropylene (PP), 1nF, 2000 VDC (2 kV), ±5%, Radial THT, High Pulse / Snubber, CBB81"
C21: library part CAP_FILM_CBB81_470pF_2000V, "Capacitor Film, Polypropylene (PP), 470 pF, 2000 VDC, ±5%, Radial THT, Pitch 15mm, CBB81"
C22: library part CAP_FILM_CBB81_330pF_2000V, "Capacitor Film, Polypropylene (PP), 330 pF, 2000 VDC, ±5%, Radial THT, Pitch 15mm, CBB81"
C23: library part CAP_FILM_CBB81_3.2nF_2000V, "Capacitor Film, Metallized Polypropylene (PP), 3.2 nF (3.3 nF), 2000 VDC (2 kV), ±5%, Radial THT, High Pulse / Resonant Tank, CBB81"
D1 D6 D18: library part DIODE_SCHOTTKY_1N5819HW, "Schottky Barrier Diode, 40V, 1A, Vf=0.45V @ 1A, SOD-123"
D2 D5: library part DIODE_TVS_SMC_1.5SMC39AQ, "TVS Diode Unidirectional, 33.3V Vwm, 1500W (10/1000us), DO-214AB (SMC), Automotive Qualified"
D3 D7: library part DIODE_ZENER_BZX84-C15_SOT23, "Zener Diode, 15V, 250mW, ±5%, SOT-23 (TO-236AB), Gate Protection, Nexperia / NXP"
D4: library part DIODE_ARRAY_BAT54C_SOT23, "Dual Schottky Barrier Diode, Common Cathode, 30V, 200mA, Vf=0.32V @ 2mA, SOT-23"
D8 D9 D10 D11 D12 D13 D14 D15: library part DIODE_ULTRAFAST_US2M_SMA, "Ultrafast High Voltage Surface Mount Rectifier, 1000V, 2A, trr=75ns, Vf=1.7V, SMA (DO-214AC)"
D16: library part DIODE_SIC_C4D02120E_TO252, "SiC Schottky Diode, 1200V, 2A, Zero Recovery, TO-252-2 (DPAK), Pin 1: Anode, Pin 2: Cathode (Tab)"
D17: library part DIODE_SCHOTTKY_BAT54S_SOT23, "Schottky Barrier Diode Pair, 30V 200mA, Dual Series Array, SOT-23 (Pin 1: A1, Pin 2: K2, Pin 3: Common)"
DD1: library part IC_DRIVER_UCC27524DR, "Dual 5A High-Speed Low-Side Gate Driver, 4.5V to 18V VDD, Non-Inverting, SOIC-8, Texas Instruments"
DS1: "Fast monochrome screen (with a resolution of 128x64 pixels that is connected via a  seven-wire bus"
ENC?: library part ENC_EC11_THT_SW, "Rotary Encoder Incremental, 2-Bit Quadrature, with Push-Button Switch, 20 PPR, Through-Hole (THT), D-Shaft 20mm, Alps Alpine / Generic"
F1: library part FUSE_MINI_BLADE_20A, "Automotive Fuse Mini Blade, 20A, 32V DC, Fast-Acting, with PCB Holder/Clips"
J1: library part PAD_HV_TERMINAL_1P, "High Voltage Solder Pad / Wire Terminal, Single Pin THT, Hole D=1.8mm, Pad D=3.5mm"
L1: library part IND_SMD_22uH_12A, "Inductor Power Shielded SMD, 22 uH, ±20%, 12A Irms, Ferrite Core, 13.5x12.5x6.2, SRP1265A-220M"
NT: library part NET_TIE_SMD
Q1: library part MOSFET_P-CH_AOD4185, "MOSFET P-Channel, -40V, -40A, 20 mOhm @ -10V, TO-252-2L (DPAK), Alpha & Omega Semiconductor"
Q2 Q3: library part MOSFET_N_60V_CSD18534Q5A, "MOSFET N-Channel, 60V, 69A, 3.5 mOhm, Logic Level, SON-8 (DFN 5x6), Texas Instruments"
Q4: library part MOSFET_N-CH_C3M0075120K_TO247-4, "SiC Power MOSFET N-CH, 1200V, 30A, 75 mOhm, Kelvin Source, TO-247-4, Wolfspeed / Cree"
Q5: library part MOSFET_N-CH_AO3400A_SOT23, "MOSFET N-Channel, 30V, 5.7A, 28 mOhm @ 4.5V, Logic Level, SOT-23 (TO-236AB), Alpha & Omega Semiconductor"
R1: library part RES_0603_47.5k_1%, "Resistor, 47.5 kOhm, ±1%, 0.1W (1/10W), SMD 0603, Thick Film, Yageo"
R2 R3: library part RES_0603_100k_1%, "Resistor, 100 kOhm, ±1%, 0.1W (1/10W), SMD 0603, Thick Film, Yageo"
R4 R5 R12 R13 R18 R19 R44 R46: library part RES_0603_10k_1%, "Resistor, 10 kOhm, ±1%, 0.1W (1/10W), 75V, SMD 0603, Thick Film, Hitano"
R6 R7 R8 R9 R10: library part RES_0603_33R_1%, "Resistor, 33 Ohm, ±1%, 0.1W (1/10W), SMD 0603, Thick Film, Yageo", Manufacturer=Yageo, Part Number=RC0603FR-0733RL
R11 R17: library part RES_1206_5.62R_1%, "Resistor, 5.62 Ohm, ±1%, 0.25W (1/4W), 200V, SMD 1206, Thick Film, Panasonic"
R14 R16 R42: library part RES_0603_4R7, "Resistor, 4.7 Ohm, ±5%, 0.1W (1/10W), 50V, SMD 0603, Gate Drive Series, KOME"
R15 R20: library part RES_0603_1k_1%, "Resistor, 1 kOhm, ±1%, 0.1W (1/10W), 75V, SMD 0603, Thick Film, Yageo"
R21: library part RES_0805_300R_1%, "Resistor, 300 Ohm, ±1%, 0.125W (1/8W), 150V, SMD 0805, Thick Film, Yageo"
R22: library part RES_0603_3.9k_1%, "Resistor, 3.9 kOhm, ±1%, 0.1W (1/10W), 75V, SMD 0603, Thick Film, Yageo"
R23 R24 R25 R26: library part RES_1206_510k_1%, "Resistor, 510 kOhm, ±1%, 0.25W (1/4W), 200V, SMD 1206, High Voltage Divider, Thick Film, Yageo"
R27 R28 R29 R30 R31: library part RES_1206_3.9M_5%, "Resistor, 3.9 MOhm, ±5%, 0.25W (1/4W), 200V, SMD 1206, Bleeder / High Resistance, Thick Film, Hitano"
R32 R33 R36 R37 R40 R41: library part RES_2512_12R_1W_5%, "Resistor, 12 Ohm, ±5%, 1W, 200V, SMD 2512, High Power Pulse Snubber, Thick Film, UniOhm / Yageo"
R34 R35 R38 R39: library part RES_1206_4.7k_1%, "Resistor, 4.7 kOhm, ±1%, 0.25W (1/4W), 200V, SMD 1206, Thick Film, Hitano"
R43: library part RES_1206_0R, "just in case"
R45 R47: library part RES_0805_110R_0.1%, "Resistor Thin Film, 110 Ohm, ±0.1%, 0.125W (1/8W), 150V, SMD 0805, High Precision Gate Resistor, Yageo"
S1: library part SW_SLIDE_SPDT_SS12D00, "Slide Switch, SPDT (1P2T), 50V DC 0.5A, Through-Hole (THT), Vertical, Actuator Height 6mm"
SOL1: library part ACTUATOR_SOLENOID_0520D_DC6V, "Miniature Micro Solenoid Air Valve, 2-Position 2-Way Normally Closed (N/C), DC 3V - 6V, Gas Cutoff, 0520D"
SW1: library part SW_PUSH_OFF-ON_PANEL, "Switch Tactile"
T1: library part TRANS_EFD20_CUSTOM, "Custom ZVS Step-Up Transformer, EFD20 Core (N87/PC40), 8-Pin Bobbin, Push-Pull Center-Tapped Primary"
T2: library part TRANS_AUTOTRANS_T2_N87, "Pulse Autotransformer, Ferrite Ring Epcos B64290-L632-X87 (N87), Pri: Braid 3.0mm (1-2T), Sec: UL3239 28AWG (10-12T)"
U1: library part MODULE_DC-DC_MP2315_3V3, "DC-DC Step-Down Buck Converter Module, MP2315, Vin 4.5V-24V, Vout 3.3V 3A, Sub-Board PCB Mount"
U2: "Arm Cortex-M4 core with DSP and FPU, 170MHz with 32Kbytes of Flash memory, Math Accelerator, Medium Analog level integration STM board"
U3: library part IC_REG_LDO_ME6211C50M5G, "LDO Voltage Regulator, Fixed 5.0V, 500mA, Low Noise, High PSRR, SOT-23-5, Microne"
U4: library part MODULE_DCDC_B0505S-1WR3, "Isolated DC-DC Converter, 5V In, 5V Out, 1W (200mA), 3000 VDC Isolation, Unregulated, SIP-4, Mornsun"
U5: library part IC_ISO_AMP_AMC1311BDWVR, "Precision Isolated Amplifier, 0V to 2V Input, 5kVrms Isolation, High CMTI (100kV/us), SOIC-8 Wide (DWV), Texas Instruments"
U6: library part MODULE_DCDC_MT3608_STEP-UP, "Miniature DC-DC Step-Up Boost Converter Module, Vin 2-24V, Vout Adj 5-28V (Preset to 15V), 2A Max, MT3608"
U7: library part IC_GATE_DRIVER_UCC27511DBVR, "Single-Channel High-Speed Low-Side Gate Driver, 4A Source / 8A Sink, Split Outputs (OUTH/OUTL), 4.5V to 18V, SOT-23-6, Texas Instruments"
U8: library part MODULE_LDO_LM78L05_SO8, "IC REG LINEAR 5V 100MA SOIC-8, Vin up to 30V"
XP1: library part CONN_XT30PW-M_2P, "Connector DC Power, XT30 Male 90° (Right Angle) PCB Mount, 2-Pin, 30A Cont. / 50A Peak, Amass XT30PW-M"

## Nets (pads, with @x,y where several pads share a name; then routed paths per layer and width w, separated by ;. In a path a pad name is that pad's centre, name@x,y a point inside that pad or via, vN(x,y) a via of type N, cw(c..) or ccw(c..) an arc to the next point about the centre after c; other vN are vias at no path point)
+3V3: C7.1 C8.1 C18.2 C31.2 C32.2 D4.3 DS1.2 R4.2 R5.2 U1.1 U2.1 U2.2 U2.25 U2.26 U5.8
+5V_ISO_IN: C30.2 U4.2 U8.1
+5V_ISO_RAW: C15.2 R21.2 U3.1 U3.3 U4.4
+15V_SIC: C24.1 C25.2 C26.1 D17.2 U6.3 U7.1
GND: C1.2 C2.2 C3.1 C4.1 C5.1 C6.1 C7.2 C8.2 C9.1 C10.1 C11.1 C12.1 C14.1 C18.1 C25.1 C27.1 C28.1 C29.1 C30.1 C31.1 C32.1 D2.2 D3.1 D5.2 D7.1 DD1.3 DS1.1 ENC?.C NT.2 Q2.1 Q3.1 Q5.2 R1.2 R13.1 R15.1 R19.1 R20.1 R46.1 S1.3 SW1.2 U1.2 U2.3 U2.4 U2.27 U2.28 U4.1 U5.5 U6.2 U6.4 U8.2 U8.3 U8.6 U8.7 XP1.2
HV_BUS: C19.2 C20.2 C21.2 C22.2 C23.1 D8.1 D9.1 R26.1 R27.2 R34.1 R38.1 T2.1
HV_GND: C15.1 C16.2 C17.1 C19.1 C20.1 D14.2 D15.2 NT.1 Q4.2 R21.1 R22.2 R31.1 T2.3 U3.2 U4.3 U5.3 U5.4
HV_OUT: J1.1 T2.4
NetC1_1: C1.1 R1.1 R3.2 U2.44
NetC6_2: C6.2 ENC?.D R4.1 U2.29
NetC9_2: C9.2 R5.1 SW1.1 U2.15
NetC16_1: C16.1 R22.1 R23.2 U5.2
NetC17_2: C17.2 U3.5 U5.1
NetC21_1: C21.1 C22.1 R32.2 R33.2
NetC23_2: C23.2 D16.2 R35.2 R39.2
NetD1_1: D1.1 DD1.7 R14.1
NetD1_2: D1.2 D3.3 Q2.2 R13.2 R14.2
NetD4_1: D4.1 R12.1 R15.2 U2.35
NetD4_2: D4.2 R18.1 R20.2 U2.41
NetD6_1: D6.1 DD1.5 R16.1
NetD6_2: D6.2 D7.3 Q3.2 R16.2 R19.2
NetD8_2: D8.2 D10.1
NetD9_2: D9.2 D11.1
NetD10_2: D10.2 D12.1 T1.8
NetD11_2: D11.2 D13.1 T1.5
NetD12_2: D12.2 D14.1
NetD13_2: D13.2 D15.1
NetD18_2: D18.2 Q5.3 SOL1.2
NetDD1_2: DD1.2 U2.10
NetDD1_4: DD1.4 U2.11
NetDS1_3: DS1.3 R6.1
NetDS1_4: DS1.4 R8.1
NetDS1_5: DS1.5 R10.2
NetDS1_6: DS1.6 R9.1
NetDS1_7: DS1.7 R7.1
NetENC?_A: ENC?.A U2.22
NetENC?_B: ENC?.B U2.21
NetF1_2: F1.2 Q1.3 R2.2
NetQ1_1: Q1.1 R2.1 S1.2
NetQ5_1: Q5.1 R45.1 R46.2
NetR6_2: R6.2 U2.18
NetR7_2: R7.2 U2.19
NetR8_2: R8.2 U2.20
NetR9_2: R9.2 U2.23
NetR10_1: R10.1 U2.24
NetR23_1: R23.1 R24.2
NetR24_1: R24.1 R25.2
NetR25_1: R25.1 R26.2
NetR27_1: R27.1 R28.2
NetR28_1: R28.1 R29.2
NetR29_1: R29.1 R30.2
NetR30_1: R30.1 R31.2
NetR32_1: R32.1 R36.2
NetR33_1: R33.1 R37.2
NetR34_2: R34.2 R35.1
NetR36_1: R36.1 R40.2
NetR37_1: R37.1 R41.2
NetR38_2: R38.2 R39.1
NetR42_2: R42.2 U7.2
NetR43_2: R43.2 U7.3
NetR45_2: R45.2 U2.33
NetR47_1: R47.1 U7.6
NetR47_2: R47.2 U2.12
NetU2_39: U2.39 U5.6
NetU2_42: U2.42 U5.7
SIC_DRAIN: D16.1 Q4.1 R40.1 R41.1 T2.2
SIC_GATE: D17.3 Q4.4 R42.1 R43.1 R44.2
SIC_KELVIN: C24.2 C26.2 D17.1 Q4.3 R44.1 U7.4 U7.5
VBAT_RAW: F1.1 XP1.1
VBAT_SW: C2.1 C3.2 C4.2 C5.2 C10.2 C11.2 C27.2 C28.2 C29.2 D18.1 DD1.1 DD1.6 DD1.8 L1.1 Q1.2 R3.1 SOL1.1 U1.3 U6.1 U8.8
ZVS_CT: L1.2 T1.2
ZVS_DRAIN1: C13.2 D2.1 Q2.3 R11.2 R12.2 T1.1
ZVS_DRAIN2: C13.1 D5.1 Q3.3 R17.2 R18.2 T1.3
pads on no net: C12.2 C14.2 D3.2 D7.2 D16.3 J1. R11.1 R17.1 S1.1 T1. T2. U1.4 U2.5 U2.6 U2.7 U2.9 U2.13 U2.14 U2.16 U2.17 U2.30 U2.31 U2.32 U2.34 U2.36 U2.37 U2.38 U2.40 U2.43 U2.45 U2.46 U2.47 U2.48 U3.4 U8.4 U8.5 XP1.

## Text inside footprints (layer, text, board x,y; h text height)
C2: Top Overlay "+" at -64.508,-9.125 h0.8 r270
DS1: Top Overlay "GND" at -88.475,7.711 h0.8 r270; Top Overlay "VCC" at -88.475,5.161 h0.8 r270; Top Overlay "D0" at -88.475,2.311 h0.8 r270; Top Overlay "D1" at -88.475,-0.372 h0.8 r270; Top Overlay "RES" at -88.475,-2.389 h0.8 r270; Top Overlay "DC" at -88.475,-5.314 h0.8 r270; Top Overlay "CS" at -88.475,-7.889 h0.8 r270
ENC?: Top Overlay "ENC" at -88.845,21.345 h0.8 r90
F1: Top Overlay "FUSE" at -65.775,-18.209 h0.8 r270
J1: Top Overlay "HV" at 401.509,11.125 h0.8
Q4: Top Overlay "D" at 232.455,1.397 h1 r90; Top Overlay "S" at 232.405,6.497 h1 r90; Top Overlay "KS" at 232.455,8.547 h1 r90; Top Overlay "G" at 232.455,11.572 h1 r90
S1: Top Overlay "NC" at -80.725,-6.034 h0.8 r270; Top Overlay "SW" at -80.725,-8.534 h0.8 r270; Top Overlay "GND" at -80.725,-10.634 h0.8 r270
SOL1: Top Overlay "+" at 210.279,177.232 h0.8; Top Overlay "SOL" at 212.854,179.54 h0.7
SW1: Top Overlay "FIRE" at -79.1,19.025 h0.8; Top Overlay "+" at -74.07,17.438 h0.8 r180
T1: Top Overlay "SEC2" at 15.875,-7.059 h0.8 r270; Top Overlay "SEC1" at 15.875,7.808 h0.8 r270; Top Overlay "D2" at -6.725,-2.859 h0.8 r270; Top Overlay "7.4V" at -6.725,2.875 h0.8 r270; Top Overlay "D1" at -6.725,7.008 h0.8 r270
T2: Top Overlay "HV" at 83.642,8.45 h1; Top Overlay "GND" at 83.142,-3.55 h1; Top Overlay "DRAIN" at 48.426,-3.25 h1; Top Overlay "+850V" at 48.542,13.15 h1
U1: Top Overlay "3V3" at -50.425,13.555 h0.8 r270; Top Overlay "GND" at -50.425,16.23 h0.8 r270; Top Overlay "VIN" at -50.425,18.93 h0.8 r270
U6: Top Overlay "VOUT+" at 283.545,-2.604 h0.8 r180; Top Overlay "VOUT-" at 290.545,-2.604 h0.8 r180; Top Overlay "VIN" at 280.679,35.596 h0.8; Top Overlay "GND" at 287.613,35.596 h0.8
XP1: Top Overlay "+" at -75.026,-29.349 h1.5 r90